# Altium PCB 388D_Control_v1_PCB1.PcbDoc (part 4 of 7)
Units mil, origin at the board's own origin, x right, y up, seen from the top; angles counter-clockwise.
Board outline 3431 x 3800 mil, 6 copper layers (Top Layer, Singal Layer 2, Signal layer 3, Signal Layer 4, Signal Layer 5, Bottom Layer), stack 32.7 mil thick; 270 components, 383 nets, 1462 pads, 899 vias.
Unrouted connection lines stored in the file: 2.
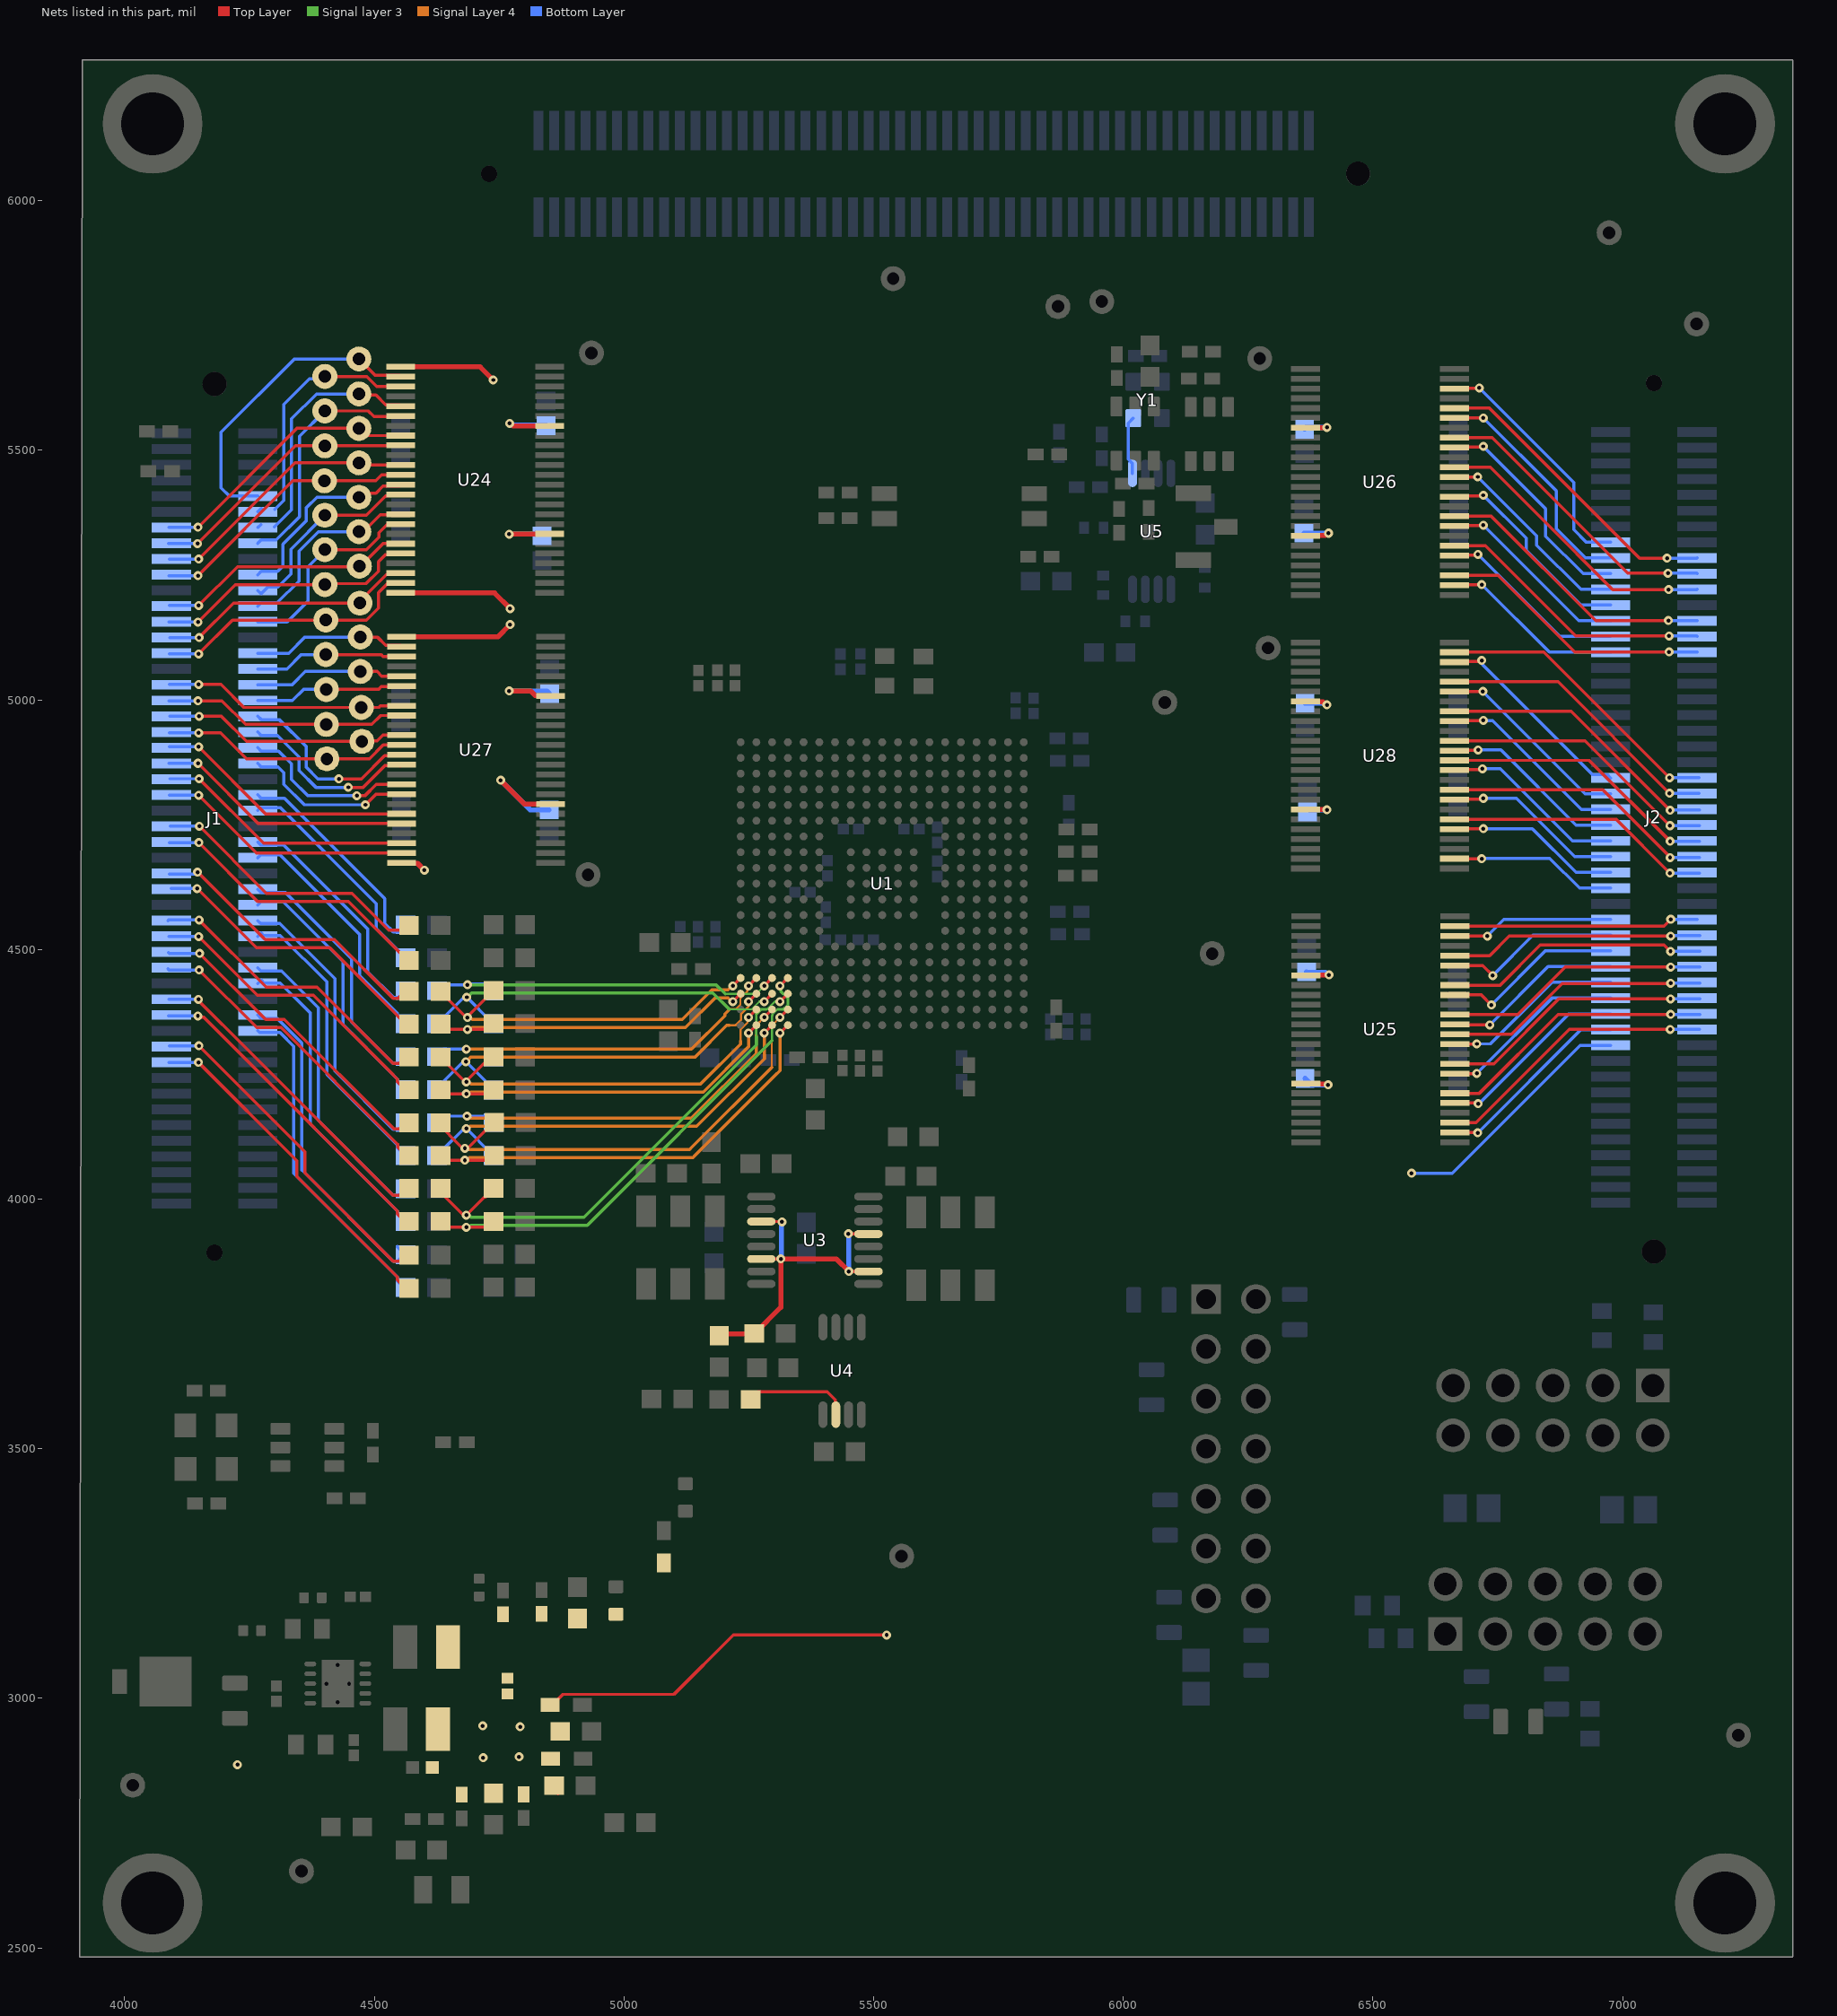
[diagram p6: the nets of this part, all layers, seen from the top]

## Via types
v1: diameter 18, hole 8, Top Layer to Bottom Layer, tented both sides, 898 vias
v2: diameter 18/18/18/18/18/18 (per signal layer), hole 8, Top Layer to Bottom Layer, tented both sides, 1 vias

## Nets (pads, with @x,y where several pads share a name; then routed paths per layer and width w, separated by ;. In a path a pad name is that pad's centre, name@x,y a point inside that pad or via, vN(x,y) a via of type N, cw(c..) or ccw(c..) an arc to the next point about the centre after c; other vN are vias at no path point) (continued)
bMCU_GPIO22: (continued)
  Top Layer w6.25: v1(4149.01,4967.1) 4193.9,4967.1 4244,4917 TP37.1@4475,4917 4475.98,4917.98 4505.71,4917.98 4517.18,4929.45 U27.11@4554.71,4929.45
  Bottom Layer w6.25: J1.38@4090.32,4967.1 v1(4149.01,4967.1)
bMCU_GPIO23: J1.40 TP38.1 U27.12 | length 498.5
  Top Layer w6.25: v1(4148.01,4934.1) 4191.9,4934.1 4244,4882 TP38.1@4405,4882 4490,4882 4517.77,4909.77 U27.12@4554.71,4909.76
  Bottom Layer w6.25: J1.40@4089.32,4934.1 v1(4148.01,4934.1)
bMCU_GPIO24: J1.37 U27.13 | length 383.9
  Top Layer w6.25: v1(4429,4842) 4474,4842 4520.54,4888.54 4553.17,4888.54 U27.13@4554.71,4890.08
  Bottom Layer w6.25: J1.37@4266.7,4967.38 4273.41,4960.66 4309.34,4960.66 4364,4906 4364,4865 4387,4842 v1(4429,4842)
bMCU_GPIO25: J1.39 U27.14 | length 370.9
  Top Layer w6.25: v1(4448,4825) 4478,4825 4521.2,4868.2 4546.96,4868.2 4549.15,4870.4 4551.93,4867.61 U27.14@4554.71,4870.39
  Bottom Layer w6.25: J1.39@4266.7,4935.89 4273.41,4929.17 4305.83,4929.17 4349,4886 4349,4859 4383,4825 v1(4448,4825)
bMCU_GPIO26: J1.41 U27.16 | length 355.6
  Top Layer w6.25: v1(4465,4808) 4481,4808 4504,4831 U27.16@4554.71,4831.02
  Bottom Layer w6.25: J1.41@4266.7,4904.39 4273.41,4897.67 4308.33,4897.67 4334,4872 4334,4841 4367,4808 v1(4465,4808)
bMCU_GPIO27: J1.43 U27.17 | length 344.7
  Top Layer w6.25: v1(4482,4790) 4503.34,4811.34 U27.17@4554.71,4811.34
  Bottom Layer w6.25: J1.43@4266.7,4872.89 4273.41,4866.18 4306.82,4866.18 4319,4854 4319,4831 4360,4790 v1(4482,4790)
bMCU_GPIO28: J1.42 U27.19 | length 520.9
  Top Layer w6.25: v1(4148.01,4906.1) 4282.14,4771.97 U27.19@4554.71,4771.97
  Bottom Layer w6.25: J1.42@4089.32,4906.1 v1(4148.01,4906.1)
bMCU_GPIO29: J2.53 U28.19 | length 398.6
  Top Layer w6.25: U28.19@6662.31,5016.76 6662.42,5016.87 6719.87,5016.87 v1(6720,5017)
  Bottom Layer w6.25: v1(6720,5017) 6924.85,4812.15 J2.53@6976.01,4812.15
bMCU_GPIO30: J1.46 U27.22 | length 517.9
  Top Layer w6.25: v1(4149.01,4842.1) 4278.19,4712.92 U27.22@4554.71,4712.91
  Bottom Layer w6.25: J1.46@4090.32,4842.1 v1(4149.01,4842.1)
bMCU_GPIO31: J1.48 U27.23 | length 513.4
  Top Layer w6.25: v1(4148.01,4809.1) 4263.88,4693.23 U27.23@4554.71,4693.23
  Bottom Layer w6.25: J1.48@4089.32,4809.1 v1(4148.01,4809.1)
bMCU_GPIO35: J2.23 U25.2 | length 400.3
  Top Layer w6.25: U25.2@6662.01,4134.45 6662.78,4133.68 6709.07,4133.68 v1(6709.85,4132.9)
  Bottom Layer w6.25: v1(6709.85,4132.9) 6916.65,4339.71 J2.23@6976.01,4339.71
bMCU_GPIO36: J2.24 U25.3 | length 567.4
  Top Layer w6.25: U25.3@6664.01,4153.08 6706.08,4153.08 6893.1,4340.1 v1@7095.01,4340.1
  Bottom Layer w6.25: v1@7095.01,4340.1 v1(7095.11,4340) 7095.21,4339.9 J2.24@7153.83,4339.9
bMCU_GPIO37: J2.26 U25.6 | length 580.6
  Top Layer w6.25: U25.6@6639.78,4212.14 U25.6@6664.01,4212.14 6713.14,4212.14 6871.1,4370.1 v1@7096.01,4370.1
  Bottom Layer w6.25: v1@7096.01,4370.1 v1(7096.11,4370) 7096.21,4369.9 J2.26@7154.83,4369.9
bMCU_GPIO38: J2.27 U25.8 | length 374.6
  Top Layer w6.25: U25.8@6664.01,4251.51 6707.51,4251.51 v1(6708,4252)
  Bottom Layer w6.25: v1(6708,4252) 6858.7,4402.7 J2.27@6976.01,4402.7
bMCU_GPIO45: J2.45 U28.8 | length 362.5
  Top Layer w6.25: U28.8@6663.14,4800.05 6664.69,4801.6 6719.6,4801.6 v1(6721,4803)
  Bottom Layer w6.25: v1(6721,4803) 6787,4803 6903.83,4686.17 J2.45@6976.01,4686.17
bMCU_GPIO51: J2.55 U28.22 | length 414.6
  Top Layer w6.25: U28.22@6664.22,5075.85 6665.77,5077.4 6716.4,5077.4 v1(6718,5079)
  Bottom Layer w6.25: v1(6718,5079) 6720.25,5076.75 6720.25,5069.88 6939.95,4850.18 6969.47,4850.18 J2.55@6976.01,4843.65
bMCU_GPIO52: J2.37 U25.22 | length 327.1
  Top Layer w6.25: U25.22@6664.01,4527.1 v1(6729,4527.1) 6729.1,4527.1 v1@6730,4528
  Bottom Layer w6.25: v1(6729,4527.1) 6762.08,4560.18 J2.37@6976.01,4560.18
bMCU_GPIO53: J2.38 U25.23 | length 491.7
  Top Layer w6.25: U25.23@6664.01,4546.78 7082.6,4546.78 v1(7096.41,4560.59)
  Bottom Layer w6.25: v1@7096,4561 v1(7096.41,4560.59) 7096.82,4560.18 J2.38@7149.24,4560.18
bMCU_GPIO54: J2.36 U25.20 | length 507.4
  Top Layer w6.25: U25.20@6664.01,4487.73 6733.73,4487.73 6773.1,4527.1 v1(7096.01,4527.1)
  Bottom Layer w6.25: v1(7096.01,4527.1) 7096.6,4527.69 J2.36@7154.83,4527.69
bMCU_GPIO55: J2.46 U28.9 | length 549.2
  Top Layer w6.25: U28.9@6663.14,4819.89 6960.23,4819.89 7096.01,4684.1 v1(7095.01,4684.1)
  Bottom Layer w6.25: v1(7095.01,4684.1) 7095.6,4684.69 J2.46@7153.83,4684.69
bMCU_GPIO56: J2.44 U28.6 | length 535.3
  Top Layer w6.25: U28.6@6663.14,4760.83 6987.28,4760.83 v1(7094.91,4653.2)
  Bottom Layer w6.25: v1(7094.91,4653.2) J2.44@7153.83,4653.2
bMCU_GPIO57: J2.54 U28.20 | length 582.3
  Top Layer w6.25: U28.20@6663.14,5036.42 6870.69,5036.42 v1(7094.01,4813.1)
  Bottom Layer w6.25: v1(7094.01,4813.1) 7094.21,4812.9 J2.54@7152.83,4812.9
bMCU_GPIO60: J2.28 U25.9 | length 544.7
  Top Layer w6.25: U25.9@6664.01,4271.19 6742.19,4271.19 6872.2,4401.2 v1(7095.91,4401.2)
  Bottom Layer w6.25: v1(7095.91,4401.2) J2.28@7154.83,4401.2
bMCU_GPIO61: J2.29 U25.11 | length 363.2
  Top Layer w6.25: U25.11@6664.01,4310.56 6707.56,4310.56 v1(6708,4311)
  Bottom Layer w6.25: v1(6708,4311) 6735,4311 6858.2,4434.2 J2.29@6976.01,4434.2
bMCU_GPIO62: J2.30 U25.12 | length 533.3
  Top Layer w6.25: U25.12@6664.01,4330.25 6777.25,4330.25 6879.1,4432.1 v1@7096.01,4432.1
  Bottom Layer w6.25: v1@7096.01,4432.1 v1(7096.3,4432.4) 7096.6,4432.69 J2.30@7154.83,4432.69
bMCU_GPIO63: J2.31 U25.13 | length 360.7
  Top Layer w6.25: U25.13@6664.01,4349.93 6664.47,4349.47 6733.53,4349.47 v1(6734,4349)
  Bottom Layer w6.25: v1(6734,4349) 6850.69,4465.69 J2.31@6976.01,4465.69
bMCU_GPIO64: J2.32 U25.14 | length 530.5
  Top Layer w6.25: U25.14@6664.01,4369.62 6789.62,4369.62 6885.1,4465.1 v1(7096.01,4465.1)
  Bottom Layer w6.25: v1(7096.01,4465.1) 7096.21,4464.9 J2.32@7154.83,4464.9
bMCU_GPIO65: J2.33 U25.16 | length 365.1
  Top Layer w6.25: U25.16@6664.01,4408.99 6717.01,4408.99 v1(6737,4389)
  Bottom Layer w6.25: v1(6737,4389) 6845.19,4497.19 J2.33@6976.01,4497.19
bMCU_GPIO66: J2.34 U25.17 | length 529.4
  Top Layer w6.25: U25.17@6664.01,4428.67 6754.67,4428.67 6835,4509 7083.11,4509 v1(7095.91,4496.2)
  Bottom Layer w6.25: v1(7095.91,4496.2) J2.34@7154.83,4496.2
bMCU_GPIO67: J2.35 U25.19 | length 353.7
  Top Layer w6.25: U25.19@6664.01,4468.04 6719.96,4468.04 v1(6740,4448)
  Bottom Layer w6.25: v1(6740,4448) 6820.68,4528.68 J2.35@6976.01,4528.68
bMCU_GPIO68: J2.79 U26.13 | length 424.9
  Top Layer w6.25: U26.13@6663.14,5446.62 6709.57,5446.62 v1(6709.85,5446.9)
  Bottom Layer w6.25: v1@6702,5446.62 6709.85,5446.62 6828.01,5328.46 6828.01,5309.99 6916.4,5221.6 J2.79@6976.01,5221.6
bMCU_GPIO69: J2.80 U26.14 | length 588
  Top Layer w6.25: U26.14@6663.14,5466.31 6734.8,5466.31 6835,5366.11 6980.11,5221 v1(7092,5221)
  Bottom Layer w6.25: v1(7092,5221) 7148.64,5221 J2.80@7149.24,5221.6
bMCU_GPIO70: J2.81 U26.16 | length 451.6
  Top Layer w6.25: U26.16@6663.14,5505.68 6664.3,5506.84 6719.84,5506.84 v1(6721,5508)
  Bottom Layer w6.25: v1(6721,5508) 6846.01,5382.99 6846.01,5327.99 6920.91,5253.09 J2.81@6976.01,5253.09
bMCU_GPIO72: J2.41 U28.2 | length 338
  Top Layer w6.25: U28.2@6663.19,4682 6663.24,4682.05 v1(6718,4682) v1(6718,4682)
  Bottom Layer w6.25: v1(6718,4682) 6718.9,4682.9 6854.1,4682.9 6913.83,4623.17 J2.41@6976.01,4623.17
bMCU_GPIO74: J2.43 U28.5 | length 349.4
  Top Layer w6.25: U28.5@6663.17,4741.02 6663.71,4741.57 6720.57,4741.57 v1(6721,4742)
  Bottom Layer w6.25: v1(6721,4742) 6819.1,4742 6906.43,4654.67 J2.43@6976.01,4654.67
bMCU_GPIO76: J1.44 U27.20 | length 516.4
  Top Layer w6.25: v1(4147.01,4873.1) 4267.82,4752.29 U27.20@4554.71,4752.28
  Bottom Layer w6.25: J1.44@4088.32,4873.1 v1(4147.01,4873.1)
bMCU_GPIO77: J2.25 U25.5 | length 386.6
  Top Layer w6.25: U25.5@6664.01,4192.45 6709.55,4192.45 v1(6710.75,4191.25)
  Bottom Layer w6.25: v1@6711.5,4190.5 6892.2,4371.2 J2.25@6976.01,4371.2
bMCU_GPIO78: J2.47 U28.11 | length 372.8
  Top Layer w6.25: U28.11@6664.2,4859.08 6665.75,4860.63 6717.63,4860.63 v1(6719,4862)
  Bottom Layer w6.25: v1(6719,4862) 6755.11,4862 6899.45,4717.66 J2.47@6976.01,4717.66
bMCU_GPIO79: J2.48 U28.12 | length 557.8
  Top Layer w6.25: U28.12@6663.14,4878.94 6933.17,4878.94 v1(7095.01,4717.1)
  Bottom Layer w6.25: v1(7095.01,4717.1) 7095.21,4716.9 J2.48@7153.83,4716.9
bMCU_GPIO80: J2.49 U28.13 | length 374.9
  Top Layer w6.25: U28.13@6663.86,4899.2 6663.93,4899.26 6710.21,4899.26 v1(6710.85,4899.9)
  Bottom Layer w6.25: v1(6710.85,4899.9) 6756.21,4899.9 6906.95,4749.16 J2.49@6976.01,4749.16
bMCU_GPIO81: J2.50 U28.14 | length 561.1
  Top Layer w6.25: U28.14@6663.14,4918.31 6924.8,4918.31 v1(7094.91,4748.2)
  Bottom Layer w6.25: v1(7094.91,4748.2) J2.50@7153.83,4748.2
bMCU_GPIO82: J2.51 U28.16 | length 386.2
  Top Layer w6.25: U28.16@6664.13,4957.79 6664.68,4958.34 6720.34,4958.34 v1(6721,4959)
  Bottom Layer w6.25: v1(6721,4959) 6721.27,4958.73 6739.38,4958.73 6917.46,4780.65 J2.51@6976.01,4780.65
bMCU_GPIO83: J2.52 U28.17 | length 573.1
  Top Layer w6.25: U28.17@6663.14,4977.36 6896.74,4977.36 v1(7095.01,4779.1)
  Bottom Layer w6.25: v1(7095.01,4779.1) 7095.6,4779.69 J2.52@7153.83,4779.69
bMCU_GPIO87: J2.56 U28.23 | length 594
  Top Layer w6.25: U28.23@6663.14,5096.1 6842.01,5096.1 v1(7093.91,4844.2)
  Bottom Layer w6.25: v1(7093.91,4844.2) J2.56@7152.83,4844.2
bMCU_GPIO88: J2.71 U26.2 | length 367.4
  Top Layer w6.25: U26.2@6664.86,5230.5 6664.9,5230.55 6717.55,5230.55 v1(6718,5231)
  Bottom Layer w6.25: v1(6718,5231) 6853.39,5095.61 J2.71@6976.01,5095.61
bMCU_GPIO89: J2.72 U26.3 | length 549.9
  Top Layer w6.25: U26.3@6663.14,5249.77 6750.23,5249.77 6904,5096 v1(7093.16,5096)
  Bottom Layer w6.25: v1(7093.16,5096) 7148.85,5096 J2.72@7149.24,5095.61
bMCU_GPIO90: J2.73 U26.5 | length 382.2
  Top Layer w6.25: U26.5@6663.14,5289.15 6664.46,5290.46 6708.69,5290.46 v1(6710.01,5291.78)
  Bottom Layer w6.25: v1(6710.01,5291.78) 6874.68,5127.11 J2.73@6976.01,5127.11
bMCU_GPIO91: J2.74 U26.6 | length 561.4
  Top Layer w6.25: U26.6@6663.14,5308.83 6725.28,5308.83 6906.11,5128 v1(7093.11,5128)
  Bottom Layer w6.25: v1(7093.11,5128) 7148.35,5128 J2.74@7149.24,5127.11
bMCU_GPIO92: J2.75 U26.8 | length 391.8
  Top Layer w6.25: U26.8@6663.93,5348.99 6664.04,5349.1 6720.1,5349.1 v1(6721,5350)
  Bottom Layer w6.25: v1(6721,5350) 6912.39,5158.61 J2.75@6976.01,5158.61
bMCU_GPIO93: J2.76 U26.9 | length 572.8
  Top Layer w6.25: U26.9@6663.14,5367.89 6737.11,5367.89 6946,5159 v1(7091.71,5159)
  Bottom Layer w6.25: v1(7091.71,5159) 7148.84,5159 J2.76@7149.24,5158.61
bMCU_GPIO94: J2.77 U26.11 | length 419.1
  Top Layer w6.25: U26.11@6663.14,5407.26 6664.51,5408.63 6719.63,5408.63 v1(6721,5410)
  Bottom Layer w6.25: v1(6721,5410) 6807.01,5323.99 6807.01,5299.99 6916.9,5190.1 J2.77@6976.01,5190.1
bMCU_GPIO95: J2.82 U26.17 | length 598.9
  Top Layer w6.25: U26.17@6663.14,5525.36 6738.64,5525.36 7010,5254 v1(7090.96,5254)
  Bottom Layer w6.25: v1(7090.96,5254) 7148.33,5254 J2.82@7149.24,5253.09
bMCU_GPIO101: J2.83 U26.19 | length 473.6
  Top Layer w6.25: U26.19@6663.14,5564.73 6663.27,5564.87 6720.87,5564.87 v1(6721,5565)
  Bottom Layer w6.25: v1(6721,5565) 6867,5419 6867,5343 6925.41,5284.59 J2.83@6976.01,5284.59
bMCU_GPIO102: J2.84 U26.20 | length 610.8
  Top Layer w6.25: U26.20@6663.14,5584.42 6733.58,5584.42 7034,5284 v1(7089,5284)
  Bottom Layer w6.25: v1(7089,5284) 7148.65,5284 J2.84@7149.24,5284.59
bMCU_GPIO103: J2.85 U26.22 | length 497
  Top Layer w6.25: U26.22@6663.14,5623.79 6663.75,5624.4 6712.4,5624.4 v1(6713,5625)
  Bottom Layer w6.25: v1(6713,5625) 6902,5436 6902,5341 6926.91,5316.09 J2.85@6976.01,5316.09